# Altium PCB mppt.PcbDoc (part 4 of 6)
Units mm, origin at the board's own origin, x right, y up, seen from the top; angles counter-clockwise.
Board outline 161 x 166 mm, 6 copper layers (Top Layer, Layer 1, Layer 2, Layer 3, Layer 4, Bottom Layer), stack 0.815 mm thick; 460 components, 230 nets, 1421 pads, 2551 vias.
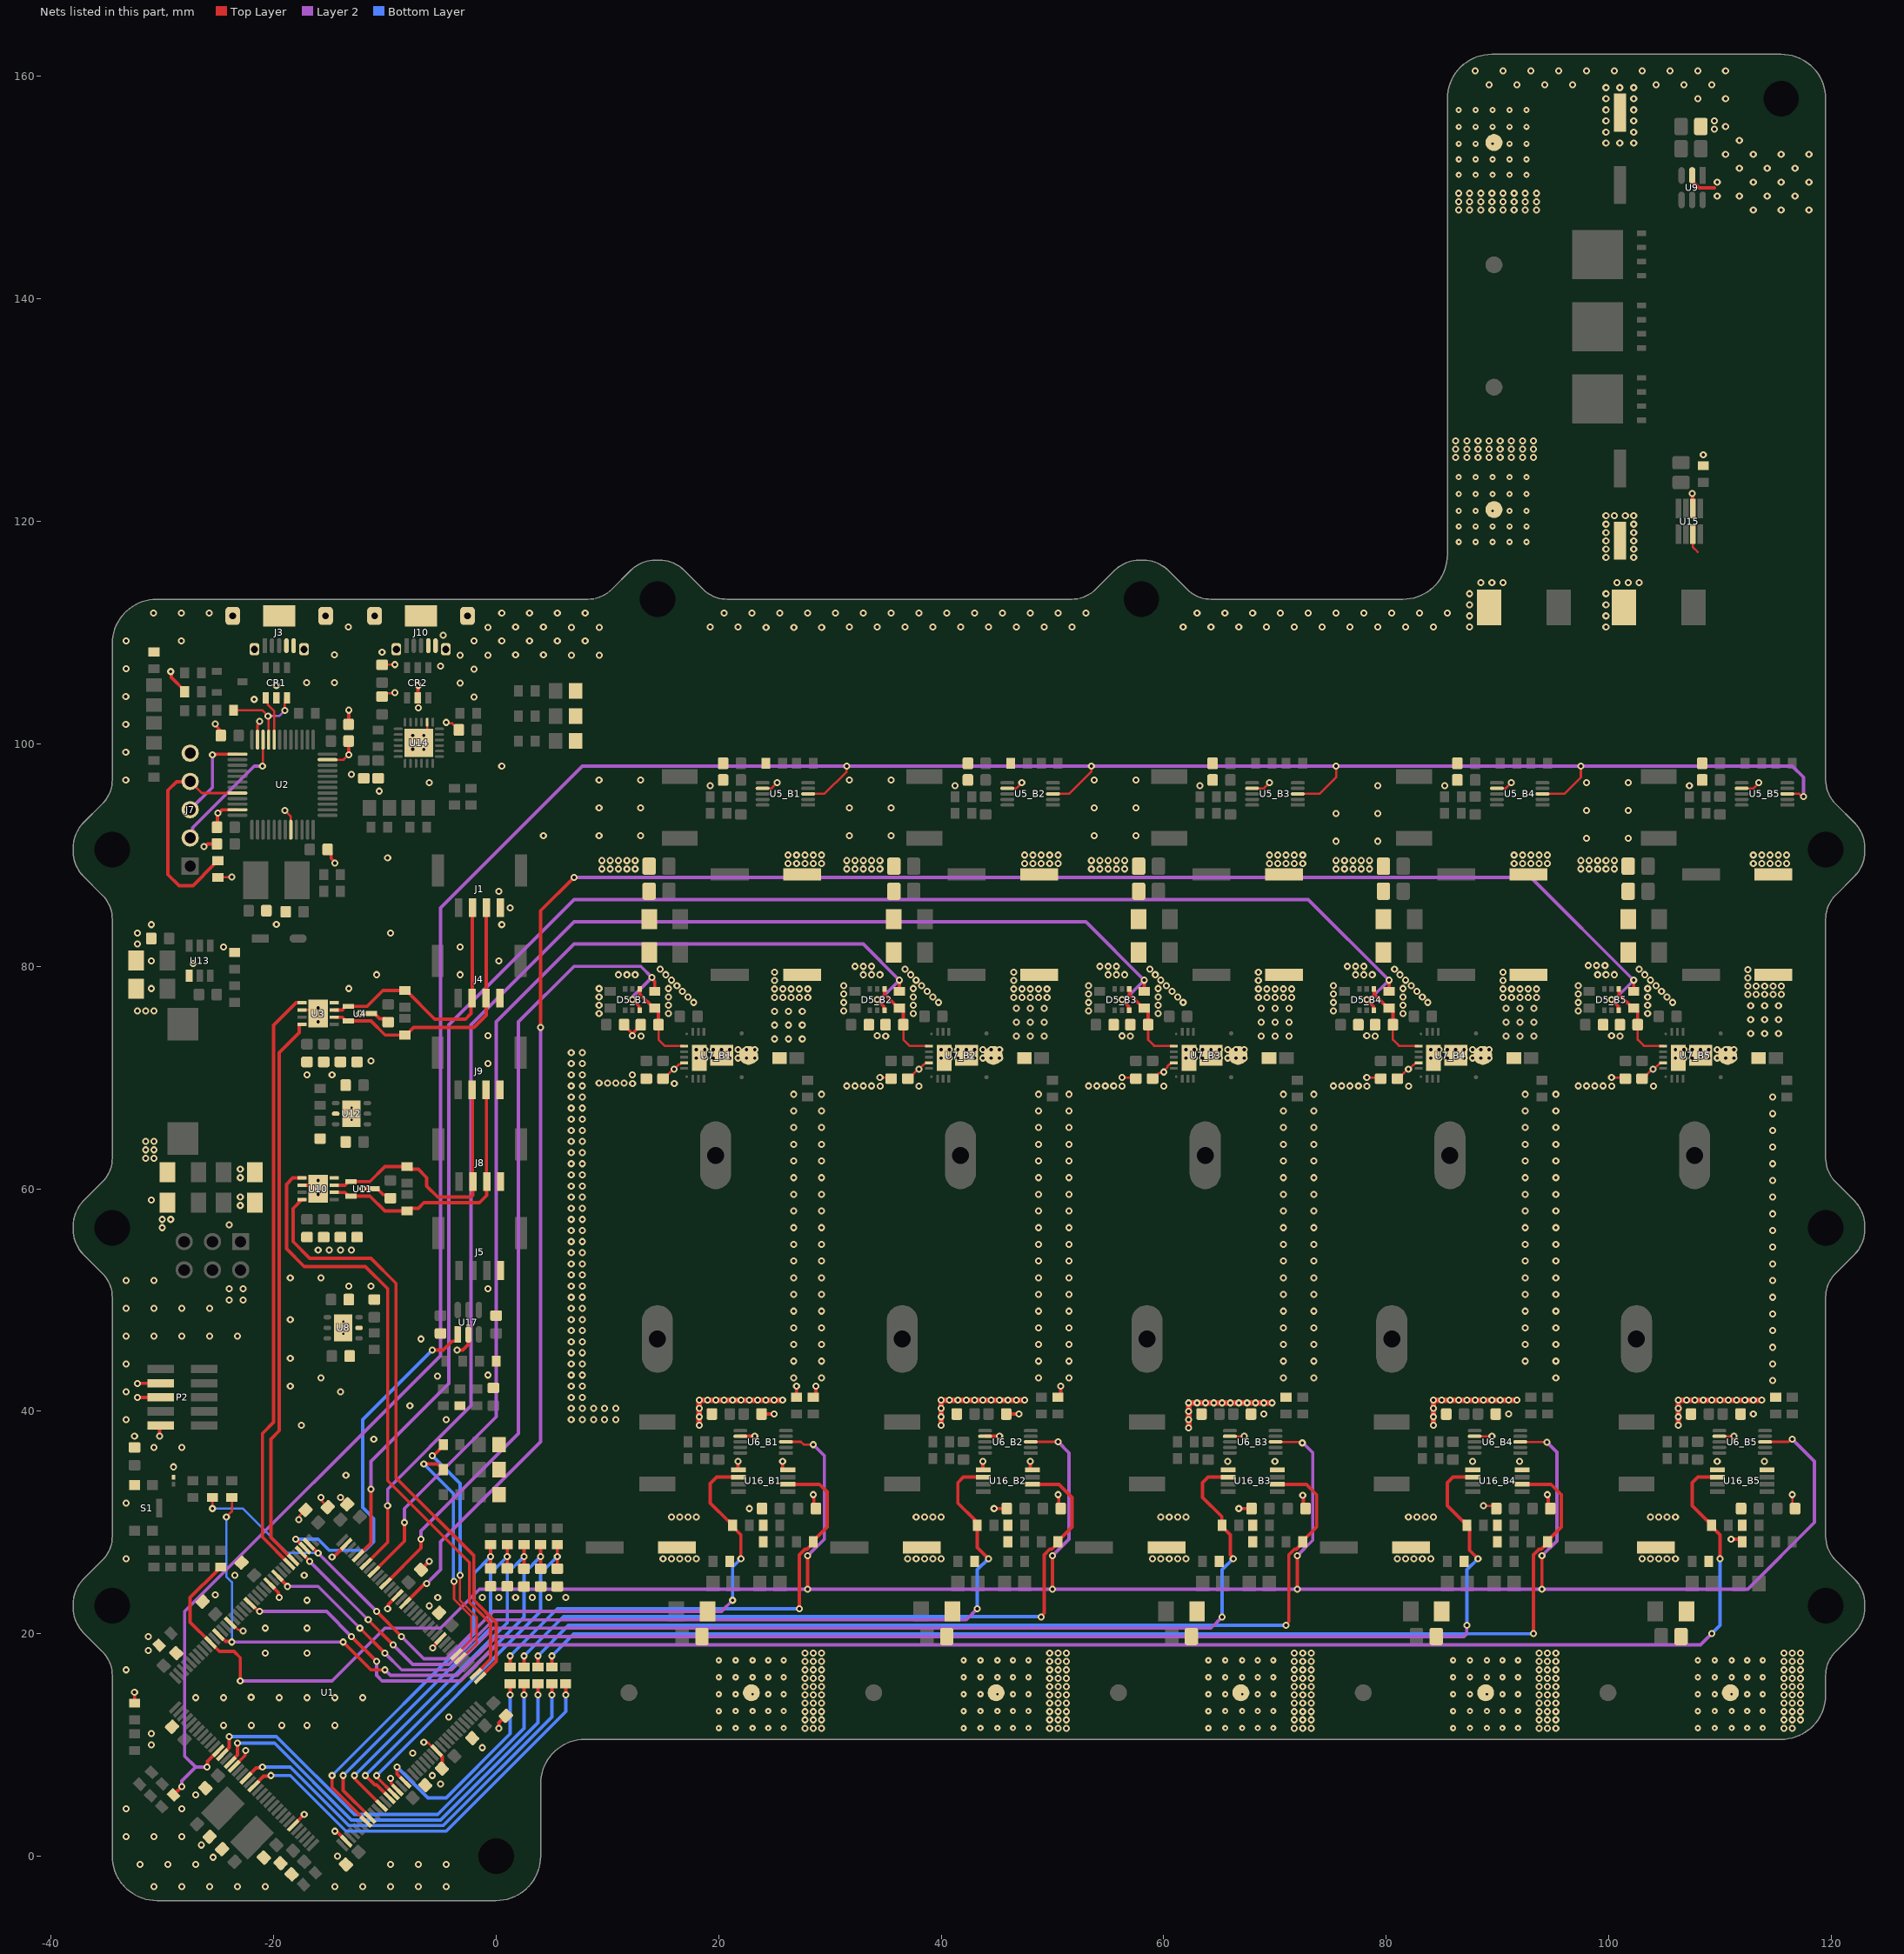
[diagram p7: the nets of this part, all layers, seen from the top]

## Via types
v1: diameter 0.635, hole 0.305, Top Layer to Bottom Layer, tented both sides, 2197 vias
v2: diameter 0.559, hole 0.203, Top Layer to Bottom Layer, tented both sides, 350 vias
v3: diameter 0.5, hole 0.2, Top Layer to Bottom Layer, 4 vias

## Nets (pads, with @x,y where several pads share a name; then routed paths per layer and width w, separated by ;. In a path a pad name is that pad's centre, name@x,y a point inside that pad or via, vN(x,y) a via of type N, cw(c..) or ccw(c..) an arc to the next point about the centre after c; other vN are vias at no path point) (continued)
ACTIVE: R75.1 U1.78 | length 22.1
  Top Layer w0.203: U1.78@-3.25,17.75 -3.153,17.75 -1.75,19.153 -1.75,21.5 -3.243,22.993 -3.243,25.243 v1(-3.25,25.25)
  Top Layer w0.3: v1(-5.75,36) -5.686,36.064 -5.586,36.064 -4.75,36.9 R75.1@-4.75,37
  Bottom Layer w0.3: v1(-5.75,36) -3.25,33.5 v1(-3.25,25.25)
ADC_I_IND_1: R10.2 U1.53 | length 19.9
  Top Layer w0.3: v1(-8.9,8.023) -8.9,7.39 U1.53@-8.167,6.657 ; v1(1.25,14.5) R10.2@1.25,15.5
  Bottom Layer w0.3: v1(-8.9,8.023) -6.127,5.25 -4.5,5.25 1.25,11 v1(1.25,14.5)
ADC_I_IND_2: R17.2 U1.13 | length 38.5
  Top Layer w0.3: U1.13@-24.608,9.132 -24.608,9.171 -24,9.778 v1(-24,10.75) ; v1(2.5,14.5) R17.2@2.5,15.5
  Bottom Layer w0.3: v1(-24,10.75) -19.75,10.75 -12.75,3.75 -5.25,3.75 2.5,11.5 v1(2.5,14.5)
ADC_I_IND_3: R18.2 U1.15 | length 39
  Top Layer w0.3: U1.15@-23.9,8.424 -23.9,8.464 -23.25,9.114 v1(-23.25,10.155) ; v1(3.75,14.5) R18.2@3.75,15.5
  Bottom Layer w0.3: v1(-23.25,10.155) -19.905,10.155 -13,3.25 -5,3.25 3.75,12 v1(3.75,14.5)
ADC_I_IND_4: R19.2 U1.19 | length 37.1
  Top Layer w0.3: U1.19@-22.486,7.01 -22.486,7.012 -21.562,7.936 -21.064,7.936 v1(-21,8) ; v1(5,14.5) R19.2@5,15.5
  Bottom Layer w0.3: v1(-21,8) -18.5,8 -13.25,2.75 -4.75,2.75 5,12.5 v1(5,14.5)
ADC_I_IND_5: R20.2 U1.21 | length 37.4
  Top Layer w0.3: U1.21@-21.779,6.303 -20.896,7.186 -20.314,7.186 v1(-20.25,7.25) ; v1(6.25,14.5) R20.2@6.25,15.5
  Bottom Layer w0.3: v1(-20.25,7.25) -18.5,7.25 -13.5,2.25 -4.5,2.25 6.25,13 v1(6.25,14.5)
ADC_NTC_1: C76.2 R21.2 U1.50 | length 30.8
  Top Layer w0.3: v1(-10.75,7.25) -10.686,7.186 -10.686,7.054 U1.50@-9.228,5.596 ; C76.2@5.5,25.85 v1(5.5,26.925) R21.2@5.5,28
  Bottom Layer w0.3: v1(-10.75,7.25) 4,22 4,25.425 v1(5.5,26.925)
ADC_NTC_2: C89.2 R22.2 U1.49 | length 31.3
  Top Layer w0.3: v1(-11.75,7.25) -10.899,6.399 -10.738,6.399 U1.49@-9.582,5.242 ; C89.2@4,25.85 v1(4,26.925) R22.2@4,28
  Bottom Layer w0.3: v1(-11.75,7.25) 2.5,21.5 2.5,25.425 v1(4,26.925)
ADC_NTC_3: C90.2 R23.2 U1.47 | length 31.9
  Top Layer w0.3: v1(-12.75,7.25) -12.686,7.186 -12.686,6.933 U1.47@-10.289,4.535 ; C90.2@2.5,25.85 v1(2.5,26.925) R23.2@2.5,28
  Bottom Layer w0.3: v1(-12.75,7.25) 1,21 1,25.425 v1(2.5,26.925)
ADC_NTC_4: C91.2 R24.2 U1.44 | length 32.7
  Top Layer w0.3: v1(-13.75,7.25) -13.75,5.915 -11.349,3.514 U1.44@-11.349,3.475 ; C91.2@1,25.863 v1(1,26.931) R24.2@1,28
  Bottom Layer w0.3: v1(-13.75,7.25) -0.5,20.5 -0.5,25.431 v1(1,26.931)
ADC_NTC_5: C92.2 R25.2 U1.43 | length 33.1
  Top Layer w0.3: v1(-14.75,7.25) -14.75,6.168 U1.43@-11.703,3.121 ; C92.2@-0.5,25.863 v1(-0.5,26.931) R25.2@-0.5,28
  Bottom Layer w0.3: v1(-14.75,7.25) -2,20 -2,25.431 v1(-0.5,26.931)
ALERT1: R48.1 U1.135 U6_B1.3 U6_B2.3 U6_B3.3 U6_B4.3 U6_B5.3 | length 238.8
  Top Layer w0.203: U6_B1.3@26.051,37.25 27.383,37.25 27.633,37 v1(28.5,37) ; U6_B2.3@48.051,37.25 v1(50.5,37.25) ; U6_B3.3@70.051,37.25 70.072,37.229 72.384,37.229 v1(72.46,37.153) ; U6_B4.3@92.051,37.25 92.072,37.229 94.424,37.229 v1(94.452,37.202) ; U6_B5.3@114.051,37.25 116.165,37.25 116.415,37.5 v1(116.5,37.5)
  Top Layer w0.3: R48.1@-24.75,26 -24.85,26 -25.1,25.75 -25.1,25.65 -27.5,23.25 -27.5,21.04 U1.135@-25.668,19.208 -24.874,18.414 -23.573,18.414 -23,17.841 v1(-23,15.75) ; v1(28,24) v1(28,27) ; v1(50,24) v1(50,27) ; v1(72,24) v1(72,27) ; v1(94,24) v1(94,27)
  Layer 2 w0.3: v1(-23,15.75) -14.75,15.75 -10,20.5 -5,20.5 -1.5,24 v1(28,24) v1(50,24) v1(72,24) v1(94,24) 112.5,24 118.5,30 118.5,35.5 v1(116.5,37.5) ; v1(28,27) 29.5,28.5 29.5,36 v1(28.5,37) ; v1(50,27) 51.5,28.5 51.5,36.25 v1(50.5,37.25) ; v1(72,27) 73.403,28.403 73.403,36.278 72.528,37.153 v1(72.46,37.153) ; v1(94,27) 95.345,28.345 95.345,36.309 v1(94.452,37.202)
ALERT2: R96.1 U1.12 U5_B1.3 U5_B2.3 U5_B3.3 U5_B4.3 U5_B5.3 | length 244.6
  Top Layer w0.203: U5_B1.3@28.051,95.5 29.5,95.5 31.5,97.5 v1(31.5,98) ; U5_B2.3@50.051,95.5 51.5,95.5 53.5,97.5 v1(53.5,98) ; U5_B3.3@72.051,95.5 74,95.5 75.5,97 v1(75.5,98) ; U5_B4.3@94.051,95.5 96,95.5 97.5,97 v1(97.5,98) ; U5_B5.3@116.051,95.5 117.133,95.5 117.383,95.25 v1(117.5,95.25)
  Top Layer w0.3: R96.1@-29,5.5 v1(-28.25,6.25) ; v1(-26,8) -25.936,8.064 -25.936,8.51 U1.12@-24.961,9.485
  Layer 2 w0.3: v1(-28.25,6.25) -28.25,6.75 -27,8 ; v1(-26,8) -27,8 ; v1(117.5,95.25) 117.5,97 116.5,98 v1(97.5,98) v1(75.5,98) v1(53.5,98) v1(31.5,98) 7.75,98 -5,85.25 -5,45 -28,22 -28,9 -27,8
B0: J7.4 R37.1 U2.44 | length 20.5
  Top Layer w0.203: J7.4@-27.5,96.62 -26.455,95.575 U2.44@-23.25,95.575
  Top Layer w0.3: J7.4@-27.5,96.62 -27.521,96.599 -28.725,96.599 -29.5,95.824 -29.5,88.25 -28.5,87.25 -27.25,87.25 -25.35,89.15 -25.35,89.25 -25.1,89.5 R37.1@-25,89.5
CAN1_H: J1.2 J4.2 R2.2 U3.7 U4.1 | length 23.9
  Top Layer w0.3: U3.7@-14.552,76.075 -13.825,76.075 -13.649,76.251 -13.649,76.321 -13.571,76.4 -11.6,76.4 -10.175,77.825 R2.2@-8.198,77.825 -8.098,77.825 -5.523,75.25 -2.75,75.25 -2.25,75.75 -2.25,77.05 J4.2@-2.15,77.15 -2.137,77.163 -2.137,85.261 J1.2@-2.125,85.273
CAN1_L: J1.3 J4.3 R3.1 U3.6 U4.2 | length 24.8
  Top Layer w0.3: U3.6@-14.552,75.425 -13.825,75.425 -13.649,75.249 -13.649,75.179 -13.571,75.1 -11.253,75.1 -9.978,73.825 R3.1@-8.198,73.825 -8.098,73.825 -7.423,74.5 -2,74.5 -0.9,75.6 J4.3@-0.9,77.15 -0.888,77.163 -0.888,85.261 J1.3@-0.875,85.273
CAN2_H: J8.2 J9.2 R50.2 U10.7 U11.1 | length 24.1
  Top Layer w0.3: U10.7@-14.302,60.325 -13.575,60.325 -13.399,60.501 -13.399,60.571 -13.321,60.65 U11.1@-13.041,60.65 -11.35,60.65 -10,62 R50.2@-8,62 -7.75,61.75 -7,61.75 -6.25,61 -6.25,60.25 -5.25,59.25 -2.276,59.25 -2.1,59.426 J8.2@-2.1,60.65 -2.125,60.675 -2.125,68.875 J9.2@-2.15,68.9
CAN2_L: J8.3 J9.3 R51.1 U10.6 U11.2 | length 24.3
  Top Layer w0.3: U10.6@-14.302,59.675 -13.575,59.675 -13.399,59.499 -13.399,59.429 -13.321,59.35 U11.2@-13.041,59.35 -11.35,59.35 -10,58 R51.1@-8,58 -7.75,58.25 -7,58.25 -6.5,58.75 -1.5,58.75 -0.85,59.4 J8.3@-0.85,60.65 -0.875,60.675 -0.875,68.875 J9.3@-0.9,68.9
CLK: J7.3 U2.37 | length 8
  Top Layer w0.3: v1(-25.5,99) -25.409,99 -25.334,99.075 U2.37@-23.25,99.075
  Layer 2 w0.3: J7.3@-27.5,94.08 -25.5,96.08 v1(-25.5,99)
D_N: CR1.1 U2.32 | length 4.1
  Top Layer w0.203: CR1.1@-20.7,104.135 -20.522,103.957 -20.522,103.522 -19.95,102.95 U2.32@-19.95,100.375
D_P: CR1.3 R42.1 U2.33 | length 8.5
  Top Layer w0.203: R42.1@-23.6,103.025 -21.025,103.025 v1(-20.5,102.5) -20.469,102.469 -20.469,100.394 U2.33@-20.45,100.375 ; v1(-19,103) -19,103.622 -18.978,103.645 -18.978,104.022 CR1.3@-18.75,104.25
  Layer 2 w0.203: v1(-20.5,102.5) -19.5,102.5 v1(-19,103)
DIO: J7.2 U2.34 | length 12
  Top Layer w0.203: v1(-21,98) -20.969,98.031 -20.969,100.356 U2.34@-20.95,100.375
  Layer 2 w0.3: J7.2@-27.5,91.54 -27.289,91.751 -27.289,92.461 -21.75,98 v1(-21,98)
  Bottom Layer w0.3: J7.2@-27.5,91.54 J7.2@-27.48,91.54 ; v1@-21.02,98 v1(-21,98)
EEV1: U1.111 U17.1 | length 32.2
  Top Layer w0.3: v1(-18,28.5) -17.995,28.5 -17.25,27.755 U1.111@-17.25,27.75 ; v1(-5.75,45.5) -4.75,45.5 -3.953,46.297 -3.585,46.297 -3.45,46.432 U17.1@-3.45,46.9
  Bottom Layer w0.3: v1(-18,28.5) -16,28.5 -15,27.5 -11.75,27.5 -11,28.25 -11,30.338 -12,31.338 -12,39.25 v1(-5.75,45.5)
ERR: R76.2 U1.79 | length 21.3
  Top Layer w0.203: v1(-3.789,24.711) -3.782,24.704 -3.782,23.1 -2.25,21.569 -2.25,19.468 U1.79@-3.468,18.25
  Top Layer w0.3: v1(-6.5,35.25) -5.25,35.25 -5.1,35.1 -5,35.1 -4.75,34.85 R76.2@-4.75,34.75
  Bottom Layer w0.3: v1(-6.5,35.25) -3.845,32.594 -3.845,24.767 v1(-3.789,24.711)
FDCAN1_RX: U1.114 U3.4 | length 50.3
  Top Layer w0.3: U1.114@-18.244,26.632 -20.25,28.639 -20.25,37.5 -19.5,38.25 -19.5,72.25 -17.704,74.046 -17.704,74.773 -17.702,74.775 U3.4@-17.448,74.775
FDCAN1_TX: U1.115 U3.1 | length 53.2
  Top Layer w0.3: U1.115@-18.597,26.279 -21,28.682 -21,38 -20,39 -20,74.71 -17.988,76.723 -17.45,76.723 U3.1@-17.448,76.725
FDCAN2_RX: U1.73 U10.4 | length 55
  Top Layer w0.3: U10.4@-17.198,59.025 -17.452,59.025 -18.25,58.227 -18.25,55.25 -16.75,53.75 -11.25,53.75 -9,51.5 -9,34 -2,27 -2,23 0,21 0,17.515 -1.45,16.065 U1.73@-1.45,16.026
FDCAN2_TX: U1.74 U10.1 | length 57.3
  Top Layer w0.3: U10.1@-17.198,60.975 U10.1@-17.448,60.975 -18.275,60.975 -18.845,60.405 -18.845,54.595 -17.25,53 -11.75,53 -9.75,51 -9.75,33.75 -2.402,26.402 -2.402,22.834 -0.5,20.932 -0.5,17.722 -1.803,16.419 U1.74@-1.803,16.379
FLT_1: R14.1 R16_B1.1 U1.110 U16_B1.6 | length 71.5
  Top Layer w0.203: v1(-25.5,31.25) R14.1@-25.5,32.25
  Top Layer w0.3: U1.110@-16.829,28.047 -16.813,28.047 -16.016,27.25 v1(-16,27.25) ; v1(-10.75,22) v1(-8.5,19.75) ; U16_B1.6@21.784,34.075 19.825,34.075 19.25,33.5 19.25,31.75 20.9,30.1 21,30.1 21.25,29.85 21.25,29.65 22,28.9 v1(22,26.75)
  Layer 2 w0.3: v1(-16,27.25) v1(-10.75,22) ; v1(-8.5,19.75) -6.5,17.75 -4.5,17.75 -0.25,22 20.25,22 v1(21.25,23)
  Bottom Layer w0.203: v1(-25.5,31.25) -22.75,31.25 -18.75,27.25 v1(-16,27.25)
  Bottom Layer w0.3: v1(21.25,23) 21.25,26 v1(22,26.75)
FLT_2: R16_B2.1 U1.112 U16_B2.6 | length 82.4
  Top Layer w0.3: U1.112@-17.536,27.34 -17.536,27.313 -16.75,26.527 v1(-16.75,26.5) ; v1(-11.5,21.25) v1(-9.25,19) ; U16_B2.6@43.784,34.075 42.001,34.075 41.5,33.574 41.5,31.75 43,30.25 43,30 R16_B2.1@43.25,29.75 43.25,27.75 v1(44.25,26.75)
  Layer 2 w0.3: v1(-16.75,26.5) v1(-11.5,21.25) ; v1(-9.25,19) -7.5,17.25 -4.25,17.25 -0.25,21.25 42.25,21.25 v1(43.25,22.25)
  Bottom Layer w0.3: v1(43.25,22.25) 43.25,25.75 v1(44.25,26.75)
FLT_3: R16_B3.1 U1.118 U16_B3.6 | length 106.5
  Top Layer w0.3: U1.118@-19.658,25.218 -19.658,25.188 -18.75,24.28 v1(-18.75,24.25) ; v1(-12.25,20.5) v1(-10,18.25) ; U16_B3.6@65.784,34.075 64.001,34.075 63.5,33.574 63.5,32.25 65.226,30.524 65.226,29.774 R16_B3.1@65.25,29.75 65.25,29.65 66,28.9 66,27.091 66.25,26.841 v1(66.25,26.75)
  Layer 2 w0.3: v1(-18.75,24.25) -16,24.25 v1(-12.25,20.5) ; v1(-10,18.25) -8.5,16.75 -4,16.75 -0.25,20.5 64.25,20.5 v1(65.25,21.5)
  Bottom Layer w0.3: v1(65.25,21.5) 65.25,25.75 v1(66.25,26.75)
FLT_4: R15.1 R16_B4.1 U1.133 U16_B4.6 | length 146.4
  Top Layer w0.203: v1(-24.25,30.5) -23.75,31 R15.1@-23.75,32.25
  Top Layer w0.3: U1.133@-24.961,19.915 -24.922,19.915 -24.321,19.314 -23.814,19.314 v1(-23.75,19.25) ; v1(-13.75,19.25) -11.25,16.75 v1(-10,16.75) ; U16_B4.6@87.784,34.075 86.001,34.075 85.5,33.574 85.5,31.5 86.9,30.1 87,30.1 87.25,29.85 R16_B4.1@87.25,29.75 87.5,29.5 87.5,27.5 v1(88.25,26.75)
  Layer 2 w0.3: v1(-23.75,19.25) v1(-13.75,19.25) ; v1(-10,16.75) -9.5,16.25 -3.5,16.25 0,19.75 87,19.75 87.233,19.983 87.233,20.733 v1(87.25,20.75)
  Bottom Layer w0.203: v1(-24.25,30.5) -24.25,25.125 -23.75,24.625 v1(-23.75,19.25)
  Bottom Layer w0.3: v1(87.25,20.75) 87.25,25.75 v1(88.25,26.75)
FLT_5: R16_B5.1 U1.125 U16_B5.6 | length 154.2
  Top Layer w0.3: U1.125@-22.133,22.743 -22.093,22.743 -21.414,22.064 -21.314,22.064 v1(-21.25,22) ; v1(-13,19.75) v1(-10.75,17.5) ; U16_B5.6@109.784,34.075 108.001,34.075 107.5,33.574 107.5,31.5 108.9,30.1 109,30.1 109.25,29.85 109.25,29.65 110,28.9 v1(110,26.75)
  Layer 2 w0.3: v1(-21.25,22) -15.25,22 v1(-13,19.75) ; v1(-10.75,17.5) -10.75,16.25 -10.25,15.75 -3.25,15.75 0,19 108,19 ; 108.001,18.999 108.249,18.999 v1(109.25,20)
  Bottom Layer w0.3: v1(109.25,20) 110,20.75 v1(110,26.75)
GND: C1.2 C2.2 C3.1 C4.1 C5.1 C6.1 C7.1 C8.1 C9.1 C10.1 C11.1 C12.1 C13.1 C14.1 C15.1 C16.1 C17.1 C18.1 C19.1 C20.1 C21.1 C22.1 C23_B1.1 C23_B2.1 C23_B3.1 C23_B4.1 C23_B5.1 C24_B1.1 C24_B2.1 C24_B3.1 C24_B4.1 C24_B5.1 C25_B1.1 C25_B2.1 C25_B3.1 C25_B4.1 C25_B5.1 C27_B1.1 C27_B2.1 C27_B3.1 C27_B4.1 C27_B5.1 C28_B1.1 C28_B2.1 C28_B3.1 C28_B4.1 C28_B5.1 C29_B1.2 C29_B2.2 C29_B3.2 C29_B4.2 C29_B5.2 C30_B1.2 C30_B2.2 C30_B3.2 C30_B4.2 C30_B5.2 C31_B1.1 C31_B2.1 C31_B3.1 C31_B4.1 C31_B5.1 C32_B1.1 C32_B2.1 C32_B3.1 C32_B4.1 C32_B5.1 C33_B1.1 C33_B2.1 C33_B3.1 C33_B4.1 C33_B5.1 C34_B1.1 C34_B2.1 C34_B3.1 C34_B4.1 C34_B5.1 C35_B1.1 C35_B2.1 C35_B3.1 C35_B4.1 C35_B5.1 C36_B1.2 C36_B2.2 C36_B3.2 C36_B4.2 C36_B5.2 C37_B1.1 C37_B2.1 C37_B3.1 C37_B4.1 C37_B5.1 C38.1 C39.1 C40.2 C41.1 C42.1 C43.1 C44.1 C45.1 C46.1 C47.1 C48.1 C49.1 C50_B1.1 C50_B2.1 C50_B3.1 C50_B4.1 C50_B5.1 C51_B1.1 C51_B2.1 C51_B3.1 C51_B4.1 C51_B5.1 C52_B1.1 C52_B2.1 C52_B3.1 C52_B4.1 C52_B5.1 C53.1 C54.1 C55.1 C56.1 C57.1 C58.1 C59.1 C60.1 C61.1 C64.1 C65.1 C67.1 C69.2 C70.2 C71.2 C72.2 C73.2 C74.2 C75.2 C76.1 C77.1 C78.1 C79.1 C80.1 C81.1 C82.1 C83.1 C84.1 C87_B1.1 C87_B2.1 C87_B3.1 C87_B4.1 C87_B5.1 C88_B1.1 C88_B2.1 C88_B3.1 C88_B4.1 C88_B5.1 C89.1 C90.1 C91.1 C92.1 C93.1 C94.1 CR1.2 CR2.2 D8.2 D9.K D10.K D11.K D12.K D13.K D14.K D15.2 D17.2 J1.4 J3.4 J3.5 J3.6 J3.7 J4.4 J5.4 J7.5 J8.4 J9.4 J10.4 J10.5 J10.6 J10.7 P2.3 P2.5 P2.9 R12_B1.1 R12_B3.1 R12_B5.1 R13_B1.2 R13_B2.2 R30.1 R34_B1.1 R34_B2.1 R34_B3.1 R34_B4.1 R34_B5.1 R37.2 R41.2 R44.2 R46_B1.2 R46_B2.2 R46_B3.2 R46_B4.2 R46_B5.2 R65.2 R67.2 R71.1 R84_B1.1 R84_B2.1 R84_B3.1 R84_B4.1 R84_B5.1 R85_B1.1 R85_B2.1 R85_B3.1 R85_B4.1 R85_B5.1 R86_B1.1 R86_B2.1 R93.1 R94.1 S1.2 SP2_B1.SP SP2_B2.SP SP2_B3.SP SP2_B4.SP SP2_B5.SP SP4.SP SP6.SP U1.16 U1.31 U1.38 U1.51 U1.61 U1.83 U1.94 U1.107 U1.120 U1.130 U2.8 U2.23 U2.35 U2.47 U3.2 U3.8 U3.9 U4.3 U5_B1.7 U5_B2.7 U5_B3.7 U5_B4.7 U5_B5.7 U6_B1.7 U6_B2.7 U6_B3.7 U6_B4.7 U6_B5.7 U7_B1.6 U7_B1.15 U7_B1.17 U7_B1.18 U7_B2.6 U7_B2.15 U7_B2.17 U7_B2.18 U7_B3.6 U7_B3.15 U7_B3.17 U7_B3.18 U7_B4.6 U7_B4.15 U7_B4.17 U7_B4.18 U7_B5.6 U7_B5.15 U7_B5.17 U7_B5.18 U8.2 U8.7 U9.2 U10.2 U10.8 U10.9 U11.3 U12.2 U12.7 U13.4 U14.2 U14.25 U15.2 U15.7 U16_B1.4 U16_B1.5 U16_B2.4 U16_B2.5 U16_B3.4 U16_B3.5 U16_B4.4 U16_B4.5 U16_B5.4 U16_B5.5 U17.2 | length 177.2
  Top Layer w0.203: R37.2@-25,88 -24.975,88.025 v1(-23.75,88.025) ; U1.130@-24,21 -23.828,21 -23.16,20.333 -22.833,20.333 v1(-22.75,20.25) ; U2.35@-21.45,100.375 -21.45,101.708 -21.25,101.908 v1(-21.25,102.025) ; v1(-19,94.025) -18.45,93.475 U2.8@-18.45,92.275 ; v1(-17.75,30.25) -17.667,30.333 -17.667,30.595 C11.1@-17.131,31.131 ; U3.2@-17.448,76.075 -16.325,76.075 U3.9@-16,75.75 ; v1(-15.75,32.25) -15.667,32.167 -15.667,31.917 C13.1@-15.131,31.381 ; U2.23@-15.15,98.575 -13.7,98.575 v1(-13.25,99.025) ; v1(-14,32.25) C1.2@-13.381,31.631 ; v1(-12.25,75.75) U4.3@-11.209,75.75 ; C81.1@-10.25,104.25 -9.96,104.54 -9.16,104.54 v1(-9.1,104.6) ; C79.1@-10.25,107.1 -10.225,107.125 v1(-9.1,107.125) ; v1(-6.5,10.25) -6.417,10.167 -6.082,10.167 -5.399,9.485 U1.61@-5.339,9.485 ; v1(-6.5,100.75) -6.2,101.05 U14.2@-6.2,101.951 ; v1(-4.5,101.925) -4.417,101.842 -3.942,101.842 -3.749,101.649 -3.718,101.649 -3.35,101.281 C80.1@-3.35,101.25 ; C51_B1.1@13.4,70 C51_B1.1@13.5,69.9 ; C25_B1.1@15,69.9 15.074,69.9 15.924,70.75 v1(16,70.75) 16.44,71.19 16.54,71.19 16.675,71.325 U7_B1.15@16.9,71.325 ; U5_B1.7@23.949,96 24.75,96 v1(25.25,96.5) ; v1(34.5,70) 35.4,70 C51_B2.1@35.5,69.9 ; C25_B2.1@37,69.9 37.074,69.9 37.924,70.75 v1(38,70.75) 38.403,71.153 38.441,71.153 38.589,71.302 38.877,71.302 U7_B2.15@38.9,71.325 ; U5_B2.7@45.949,96 46.75,96 v1(47.25,96.5) ; v1(56.25,70) 57.4,70 C51_B3.1@57.5,69.9 ; C25_B3.1@59,69.9 59.074,69.9 59.592,70.417 59.917,70.417 v1(60,70.5) 60,70.617 60.347,70.964 60.347,71.034 60.471,71.158 60.508,71.158 60.675,71.325 U7_B3.15@60.9,71.325 ; U6_B3.7@65.949,37.75 v1(67.25,37.75) ; U5_B3.7@67.949,96 69,96 v1(69.5,96.5) ; v1(78.25,70) 79.4,70 C51_B4.1@79.5,69.9 ; C25_B4.1@81,69.9 81.074,69.9 81.924,70.75 v1(82,70.75) 82.063,70.75 82.466,71.153 82.503,71.153 82.675,71.325 U7_B4.15@82.9,71.325 ; U6_B4.7@87.949,37.75 v1(89.5,37.75) ; v1(88.75,31.5) 89.65,31.5 C87_B4.1@89.9,31.25 ; U5_B4.7@89.949,96 90.75,96 v1(91.25,96.5) ; v1(100.25,70) 101.4,70 C51_B5.1@101.5,69.9 ; C25_B5.1@103,69.9 103.074,69.9 103.924,70.75 v1(104,70.75) 104.063,70.75 104.466,71.153 104.503,71.153 104.675,71.325 U7_B5.15@104.9,71.325 ; U15.7@107.575,118.849 107.575,117.675 108,117.25 ; U6_B5.7@109.949,37.75 v1(111.25,37.75) ; U5_B5.7@111.949,96 113,96 v1(113.5,96.5) ; v1(116.5,32.5) 116.51,32.49 116.51,31.49 C88_B5.1@116.75,31.25
  Top Layer w0.3: R67.2@-32.5,13.75 v1(-32.5,14.75) ; v1(-32.25,41.25) P2.5@-30.15,41.25 ; v1(-32.25,42.5) -32.24,42.51 -30.16,42.51 P2.3@-30.15,42.52 ; v1(-30.25,37.75) -30.25,38.61 P2.9@-30.15,38.71 ; v1(-29.25,106.5) -29.186,106.436 -29.186,105.961 -28,104.775 R41.2@-28,104.675 ; v1(-26.25,90.775) -26.159,90.775 -25.934,91 C44.1@-25.1,91 ; v1(-25.25,101.775) -25.186,101.711 -25.186,101.613 -24.45,100.877 C41.1@-24.45,100.825 ; C43.1@-25.1,92.5 -25.05,92.55 -25.05,93.725 v1(-25,93.775) -24.909,93.775 -24.609,94.075 U2.47@-23.25,94.075 ; U1.16@-23.547,8.071 -22.564,9.054 -22.564,9.436 v1(-22.5,9.5) ; U1.120@-20.365,24.511 -19.564,23.71 -19.564,23.314 v1(-19.5,23.25) ; U1.31@-18.244,2.768 -18.238,2.768 -17.256,3.75 v1(-17.25,3.75) ; U10.2@-17.198,60.325 -16.075,60.325 U10.9@-15.75,60 ; C45.1@-15.15,90.5 -14.828,90.177 -14.828,89.693 -14.5,89.366 v1(-14.5,89.275) ; v1(-14.75,26.905) -14.686,26.97 -14.548,26.97 -13.517,28 U1.107@-13.5,28 ; v1(-14.5,2.25) -14.436,2.186 -14.303,2.186 U1.38@-13.471,1.353 ; C46.1@-13.263,100.25 -13.256,100.244 -13.256,99.031 v1(-13.25,99.025) ; C42.1@-13.263,101.75 -13.256,101.756 -13.256,103.019 v1(-13.25,103.025) ; v1(-12,60) U11.3@-10.959,60 -10.679,60 -10.152,59.473 -9.822,59.473 C54.1@-9.5,59.15 ; U4.3@-11.209,75.75 -10.929,75.75 -10.477,75.297 -10.02,75.297 C19.1@-9.698,74.975 ; v1(-9.75,22.25) -9.686,22.314 -9.686,22.639 U1.94@-8.874,23.45 ; v1(-9.5,7) -9.436,6.936 -9.436,6.55 -8.874,5.989 U1.51@-8.874,5.95 ; CR2.2@-7.05,104.135 -7.025,104.16 -7.025,105.225 v1(-7,105.25) ; C12.1@-6.75,25.75 v1(-6,26.5) ; v1(-5.711,18.711) -5.711,18.796 -4.985,19.522 U1.83@-4.985,19.561 ; U1.61@-5.339,9.485 -5.339,9.446 -4.839,8.946 -4.839,8.441 -5,8.28 C8.1@-5,7.75 ; v1(-3.5,45.5) -3,45.5 -2.504,45.996 -2.504,46.996 U17.2@-2.5,47 ; C2.2@-2.14,10.61 C2.2@-2.103,10.572 ; v1(0.25,11.5) 0.25,11.987 C10.1@0.881,12.619 ; C28_B1.1@11.5,74.75 11.5,74.698 12.186,74.012 12.186,73.814 v1(12.25,73.75) 12.314,73.814 12.314,74.012 13,74.698 C27_B1.1@13,74.75 ; v1(18.25,40.25) 18.314,40.186 v1@18.405,40.186 ; C23_B1.1@19.078,40.113 19.4,39.791 C23_B1.1@19.4,39.75 ; v1(21.75,35.5) 21.75,34.759 U16_B1.5@21.784,34.725 ; U6_B1.7@21.949,37.75 v1(23.25,37.75) ; C50_B1.1@23.85,39.75 v1(25,39.75) ; v1(25.75,35.5) 25.75,34.791 25.816,34.725 U16_B1.4@26.216,34.725 ; R12_B1.1@27,41.25 v1(27,42.25) ; v1(28.5,32.5) 28.564,32.436 28.564,31.436 C88_B1.1@28.75,31.25 ; R86_B1.1@28.5,41.25 28.75,41.5 v1(28.75,42.25) ; v1(40,40.25) 40.064,40.186 v1@40.155,40.186 ; v1(43.75,35.5) 43.75,34.759 U16_B2.5@43.784,34.725 ; U6_B2.7@43.949,37.75 v1(45.25,37.75) ; v1(44.75,31.25) C87_B2.1@45.9,31.25 ; C50_B2.1@45.85,39.75 v1(47,39.75) ; v1(48,35.5) 48,34.791 48.066,34.725 U16_B2.4@48.216,34.725 ; v1(50.5,32.5) 50.564,32.436 50.564,31.436 C88_B2.1@50.75,31.25 ; R86_B2.1@50.5,41.25 50.75,41.5 v1(50.75,42.25) ; v1(62.25,40) 62.314,39.936 v1@62.405,39.936 ; v1(66.75,31.25) C87_B3.1@67.9,31.25 ; v1(72.497,32.451) 72.562,32.387 72.562,31.438 C88_B3.1@72.75,31.25 ; v1(84.25,40.25) 84.314,40.186 v1@84.405,40.186 ; v1(94.5,32.5) 94.564,32.436 94.564,31.436 C88_B4.1@94.75,31.25 ; v1(106.25,40.25) 106.314,40.186 v1@106.405,40.186 ; v1(107.5,122.5) 107.538,122.462 107.538,121.188 U15.2@107.575,121.151 ; U9.2@107.5,151.1 107.5,150.633 108.133,150 109.5,150 ; v1(111,28.5) 111.75,28.5 R85_B5.1@112,28.25
  Top Layer w0.5: v1(18.25,38.75) v1(18.25,41) v1(19,41) v1(19.75,41) v1(20.5,41) v1(21.25,41) v1(22,41) v1(22.75,41) v1(23.5,41) v1(24.25,41) v1(25,41) v1(25.75,41) ; v1(40,38.75) v1(40,41) v1(40.75,41) v1(41.5,41) v1(42.25,41) v1(43,41) v1(43.75,41) v1(44.5,41) v1(45.25,41) v1(46,41) v1(46.75,41) v1(47.5,41) ; v1(62.25,38.5) v1(62.25,40.75) v1(63,40.75) v1(63.75,40.75) v1(64.5,40.75) v1(65.25,40.75) v1(66,40.75) v1(66.75,40.75) v1(67.5,40.75) v1(68.25,40.75) v1(69,40.75) v1(69.75,40.75) ; v1(84.25,38.75) v1(84.25,41) v1(85,41) v1(85.75,41) v1(86.5,41) v1(87.25,41) v1(88,41) v1(88.75,41) v1(89.5,41) v1(90.25,41) v1(91,41) v1(91.75,41) ; v1(106.25,38.75) v1(106.25,41) v1(107,41) v1(107.75,41) v1(108.5,41) v1(109.25,41) v1(110,41) v1(110.75,41) v1(111.5,41) v1(112.25,41) v1(113,41) v1(113.75,41)
  other v1: -30.75,-2.75 -28.25,-2.75 -25.75,-2.75 -23.25,-2.75 -20.75,-2.75 -14.5,-2.75 -12,-2.75 -9.5,-2.75 -7,-2.75 -4.5,-2.75 -32,-0.75 -29.5,-0.75 -27,-0.75 -9.5,-0.75 -7,-0.75 -4.5,-0.75 -25.432,-0.102 -14.25,0 -26.5,1 -33.25,1.75 -30.75,1.75 -28.25,1.75 -33.25,4.25 -28.25,4.25 -27,5.5 -5,6.5 -5.75,7.25 -7.5,9.25 -1.25,9.75 -31,10 -31,11.025 27.75,11.5 28.5,11.5 29.25,11.5 49.75,11.5 50.5,11.5 51.25,11.5 71.75,11.5 72.5,11.5 73.25,11.5 93.75,11.5 94.5,11.5 95.25,11.5 115.75,11.5 116.5,11.5 -24.5,11.75 -22,11.75 -19.25,11.75 -17,11.75 -14.5,11.75 27.75,12.25 28.5,12.25 29.25,12.25 49.75,12.25 50.5,12.25 51.25,12.25 71.75,12.25 72.5,12.25 73.25,12.25 93.75,12.25 94.5,12.25 95.25,12.25 115.75,12.25 116.5,12.25 117.25,12.25 -4.25,12.5 27.75,13 28.5,13 29.25,13 49.75,13 50.5,13 51.25,13 71.75,13 72.5,13 73.25,13 93.75,13 94.5,13 95.25,13 115.75,13 116.5,13 117.25,13 27.75,13.75 28.5,13.75 29.25,13.75 49.75,13.75 50.5,13.75 51.25,13.75 71.75,13.75 72.5,13.75 73.25,13.75 93.75,13.75 94.5,13.75 95.25,13.75 115.75,13.75 116.5,13.75 117.25,13.75 -27,14.25 -24.5,14.25 -19.5,14.25 -17,14.25 -14.5,14.25 -12,14.25 -22.022,14.284 27.75,14.5 28.5,14.5 29.25,14.5 49.75,14.5 50.5,14.5 51.25,14.5 71.75,14.5 72.5,14.5 73.25,14.5 93.75,14.5 94.5,14.5 95.25,14.5 115.75,14.5 116.5,14.5 117.25,14.5 27.75,15.25 28.5,15.25 29.25,15.25 49.75,15.25 50.5,15.25 51.25,15.25 71.75,15.25 72.5,15.25 73.25,15.25 93.75,15.25 94.5,15.25 95.25,15.25 115.75,15.25 116.5,15.25 117.25,15.25 27.75,16 28.5,16 29.25,16 49.75,16 50.5,16 51.25,16 71.75,16 72.5,16 73.25,16 93.75,16 94.5,16 95.25,16 115.75,16 116.5,16 117.25,16 -33.25,16.75 27.75,16.75 28.5,16.75 29.25,16.75 49.75,16.75 50.5,16.75 51.25,16.75 71.75,16.75 72.5,16.75 73.25,16.75 93.75,16.75 94.5,16.75 95.25,16.75 115.75,16.75 116.5,16.75 117.25,16.75 27.75,17.5 28.5,17.5 29.25,17.5 49.75,17.5 50.5,17.5 51.25,17.5 71.75,17.5 72.5,17.5 73.25,17.5 93.75,17.5 94.5,17.5 95.25,17.5 115.75,17.5 116.5,17.5 117.25,17.5 -20.75,18.25 -17,18.25 27.75,18.25 28.5,18.25 29.25,18.25 49.75,18.25 50.5,18.25 51.25,18.25 71.75,18.25 72.5,18.25 73.25,18.25 93.75,18.25 94.5,18.25 95.25,18.25 115.75,18.25 116.5,18.25 117.25,18.25 -31.25,18.5 -31.25,19.75 -20.75,20.5 -17,20.5 -6,22.5 -17,23 -5.25,23.25 -1.25,23.25 0.25,23.25 1.75,23.25 3.25,23.25 4.75,23.25 6.25,23.25 -25.25,23.5 -23.5,25.25 -17.25,25.25 -33.25,26.75 15,26.75 15.75,26.75 16.5,26.75 17.25,26.75 18,26.75 37,26.75 37.75,26.75 38.5,26.75 39.25,26.75 40,26.75 59,26.75 59.75,26.75 60.5,26.75 61.25,26.75 62,26.75 81,26.75 81.75,26.75 82.5,26.75 83.25,26.75 84,26.75 103,26.75 103.75,26.75 104.5,26.75 105.25,26.75 106,26.75 15.75,30.5 16.5,30.5 17.25,30.5 18,30.5 37.75,30.5 38.5,30.5 39.25,30.5 40,30.5 59.75,30.5 60.5,30.5 61.25,30.5 62,30.5 82,30.5 82.75,30.5 83.5,30.5 84.25,30.5 103.75,30.5 104.5,30.5 105.25,30.5 106,30.5 22.75,31.25 -33.25,31.75 -13.5,34.25 -29,35 65.75,35.5 70,35.5 87.75,35.5 92,35.5 109.75,35.5 114,35.5 -30.75,36.75 -28.25,36.75 -11,37.5 -32.5,37.75 -17.5,38.75 -33.25,39.25 -4.5,39.25 6.75,39.25 7.75,39.25 8.75,39.25 9.75,39.25 10.75,39.25 62.25,39.25 18.25,39.5 40,39.5 84.25,39.5 106.25,39.5 69,39.75 91,39.75 113,39.75 6.75,40.25 7.75,40.25 8.75,40.25 9.75,40.25 10.75,40.25 -7.75,40.5 6.75,41.25 7.75,41.25 -33.25,41.75 -14,41.75 -18.5,42.25 6.75,42.25 7.75,42.25 114.75,42.75 -15.75,43 26.75,43 29.25,43 48.75,43 51.5,43 70.75,43 73.5,43 95.25,43 -5.271,43.154 -0.75,43.25 6.75,43.25 7.75,43.25 -33.25,44.25 6.75,44.25 7.75,44.25 114.75,44.25 26.75,44.5 29.25,44.5 48.75,44.5 51.5,44.5 70.75,44.5 73.5,44.5 92.5,44.5 95.25,44.5 -18.5,44.75 6.75,45.25 7.75,45.25 114.75,45.75 26.75,46 29.25,46 48.75,46 51.5,46 70.75,46 73.5,46 92.5,46 95.25,46 6.75,46.25 7.75,46.25 -6.75,46.5 -33.25,46.75 -30.75,46.75 -28.25,46.75 -25.75,46.75 -23.25,46.75 6.75,47.25 7.75,47.25 114.75,47.25 26.75,47.5 29.25,47.5 48.75,47.5 51.5,47.5 70.75,47.5 73.5,47.5 92.5,47.5 95.25,47.5 -18.5,48.25 6.75,48.25 7.75,48.25 114.75,48.75 26.75,49 29.25,49 48.75,49 51.5,49 70.75,49 73.5,49 92.5,49 95.25,49 -33.25,49.25 -30.75,49.25 -28.25,49.25 -25.75,49.25 6.75,49.25 7.75,49.25 -24,50 -22.75,50 6.75,50.25 7.75,50.25 114.75,50.25 26.75,50.5 29.25,50.5 48.75,50.5 51.5,50.5 70.75,50.5 73.5,50.5 92.5,50.5 95.25,50.5 -24,51 -22.75,51 -0.75,51 -13.25,51.25 -11.25,51.25 6.75,51.25 7.75,51.25 -33.25,51.75 -30.75,51.75 114.75,51.75 -18.5,52 -15.75,52 26.75,52 29.25,52 48.75,52 51.5,52 70.75,52 73.5,52 92.5,52 95.25,52 6.75,52.25 7.75,52.25 6.75,53.25 7.75,53.25 114.75,53.25 26.75,53.5 29.25,53.5 48.75,53.5 51.5,53.5 70.75,53.5 73.5,53.5 92.5,53.5 95.25,53.5 6.75,54.25 7.75,54.25 -16,54.5 -15,54.5 -14,54.5 -13,54.5 114.75,54.75 26.75,55 29.25,55 48.75,55 51.5,55 70.75,55 73.5,55 92.5,55 95.25,55 6.75,55.25 7.75,55.25 6.75,56.25 7.75,56.25 114.75,56.25 -30,56.5 26.75,56.5 29.25,56.5 48.75,56.5 51.5,56.5 70.75,56.5 73.5,56.5 92.5,56.5 95.25,56.5 -24,56.75 -30,57.25 -29.25,57.25 6.75,57.25 7.75,57.25 114.75,57.75 26.75,58 29.25,58 48.75,58 51.5,58 70.75,58 73.5,58 92.5,58 95.25,58 6.75,58.25 7.75,58.25 -23,58.5 -31,59 -23,59.25 6.75,59.25 7.75,59.25 114.75,59.25 -16,59.5 26.75,59.5 29.25,59.5 48.75,59.5 51.5,59.5 70.75,59.5 73.5,59.5 92.5,59.5 95.25,59.5 6.75,60.25 7.75,60.25 -16,60.75 114.75,60.75 -23,61 26.75,61 29.25,61 48.75,61 51.5,61 70.75,61 73.5,61 92.5,61 95.25,61 6.75,61.25 7.75,61.25 -23,61.75 6.75,62.25 7.75,62.25 114.75,62.25 26.75,62.5 29.25,62.5 48.75,62.5 51.5,62.5 70.75,62.5 73.5,62.5 92.5,62.5 95.25,62.5 -31.5,62.75 -30.75,62.75 6.75,63.25 7.75,63.25 -31.5,63.5 -30.75,63.5 114.75,63.75 26.75,64 29.25,64 48.75,64 51.5,64 70.75,64 73.5,64 92.5,64 95.25,64 -31.5,64.25 -30.75,64.25 6.75,64.25 7.75,64.25 6.75,65.25 7.75,65.25 114.75,65.25 26.75,65.5 29.25,65.5 48.75,65.5 51.5,65.5 70.75,65.5 73.5,65.5 92.5,65.5 95.25,65.5 6.75,66.25 7.75,66.25 114.75,66.75 26.75,67 29.25,67 48.75,67 51.5,67 70.75,67 73.5,67 92.5,67 95.25,67 6.75,67.25 7.75,67.25 6.75,68.25 7.75,68.25 114.75,68.25 26.75,68.5 29.25,68.5 48.75,68.5 51.5,68.5 70.75,68.5 73.5,68.5 92.5,68.5 95.25,68.5 34.512,69.216 38.012,69.216 56.262,69.216 60.012,69.216 78.262,69.216 82.012,69.216 100.262,69.216 104.012,69.216 6.75,69.25 7.75,69.25 31.5,69.25 32.25,69.25 33,69.25 33.75,69.25 53.25,69.25 54,69.25 54.75,69.25 55.5,69.25 75.25,69.25 76,69.25 76.75,69.25 77.5,69.25 97.25,69.25 98,69.25 98.75,69.25 99.5,69.25 12.262,69.466 16.012,69.466 9.25,69.5 10,69.5 10.75,69.5 11.5,69.5 -17,70.25 -14.75,70.25 6.75,70.25 7.75,70.25 12.25,70.25 -0.75,71.25 6.75,71.25 7.75,71.25 -11.25,71.5 18,71.75 18.75,71.75 19.5,71.75 20.25,71.75 21,71.75 21.75,71.75 22.5,71.75 23.25,71.75 40,71.75 40.75,71.75 41.5,71.75 42.25,71.75 43,71.75 43.75,71.75 44.5,71.75 45.25,71.75 62,71.75 62.75,71.75 63.5,71.75 64.25,71.75 65,71.75 65.75,71.75 66.5,71.75 67.25,71.75 84,71.75 84.75,71.75 85.5,71.75 86.25,71.75 87,71.75 87.75,71.75 88.5,71.75 89.25,71.75 106,71.75 106.75,71.75 107.5,71.75 108.25,71.75 109,71.75 109.75,71.75 110.5,71.75 111.25,71.75 6.75,72.25 7.75,72.25 18,72.5 18.75,72.5 19.5,72.5 20.25,72.5 21,72.5 21.75,72.5 22.5,72.5 23.25,72.5 40,72.5 40.75,72.5 41.5,72.5 42.25,72.5 43,72.5 43.75,72.5 44.5,72.5 45.25,72.5 62,72.5 62.75,72.5 63.5,72.5 64.25,72.5 65,72.5 65.75,72.5 66.5,72.5 67.25,72.5 84,72.5 84.75,72.5 85.5,72.5 86.25,72.5 87,72.5 87.75,72.5 88.5,72.5 89.25,72.5 106,72.5 106.75,72.5 107.5,72.5 108.25,72.5 109,72.5 109.75,72.5 110.5,72.5 111.25,72.5 25.012,73.466 26.262,73.466 27.512,73.466 13.012,73.716 35.012,73.716 46.762,73.716 48.012,73.716 49.262,73.716 57.012,73.716 68.762,73.716 70.012,73.716 71.262,73.716 79.012,73.716 90.762,73.716 92.012,73.716 93.262,73.716 101.012,73.716 56.254,73.741 -0.75,73.75 34.25,73.75 78.25,73.75 100.25,73.75 112.762,73.966 114.012,73.966 115.262,73.966 25.012,74.716 26.262,74.716 27.512,74.716 46.762,74.966 48.012,74.966 49.262,74.966 68.762,74.966 70.012,74.966 71.262,74.966 90.762,74.966 92.012,74.966 93.262,74.966 -16,75 112.762,75.216 114.012,75.216 115.262,75.216 9.25,75.75 15.5,75.75 37.5,75.75 59.5,75.75 81.5,75.75 103.5,75.75 25.012,75.966 26.262,75.966 27.512,75.966 -32.25,76 -31.5,76 -30.75,76 31.25,76 53.25,76 75.25,76 97.25,76 46.762,76.216 48.012,76.216 49.262,76.216 68.762,76.216 70.012,76.216 71.262,76.216 90.762,76.216 92.012,76.216 93.262,76.216 -16,76.25 112.762,76.466 114.012,76.466 115.262,76.466 9.25,76.5 15.5,76.5 37.5,76.5 59.5,76.5 81.5,76.5 103.5,76.5 17.75,76.75 31.25,76.75 39.75,76.75 53.25,76.75 61.75,76.75 75.25,76.75 83.75,76.75 97.25,76.75 105.75,76.75 25.012,77.216 25.762,77.216 26.512,77.216 27.262,77.216 28.012,77.216 46.512,77.216 47.262,77.216 48.012,77.216 48.762,77.216 49.512,77.216 68.512,77.216 69.262,77.216 70.012,77.216 70.762,77.216 71.512,77.216 90.512,77.216 91.262,77.216 92.012,77.216 92.762,77.216 93.512,77.216 9.25,77.25 15.5,77.25 17.25,77.25 37.5,77.25 39.25,77.25 59.5,77.25 61.25,77.25 81.5,77.25 83.25,77.25 103.5,77.25 105.25,77.25 112.512,77.466 113.262,77.466 114.012,77.466 114.762,77.466 115.512,77.466 31.25,77.5 53.25,77.5 75.25,77.5 97.25,77.5 16.75,77.75 38.75,77.75 60.75,77.75 82.75,77.75 104.75,77.75 25.012,77.966 25.762,77.966 26.512,77.966 27.262,77.966 28.012,77.966 46.512,77.966 47.262,77.966 48.012,77.966 48.762,77.966 49.512,77.966 68.512,77.966 69.262,77.966 70.012,77.966 70.762,77.966 71.512,77.966 90.512,77.966 91.262,77.966 92.012,77.966 92.762,77.966 93.512,77.966 -31,78 -13.25,78 9.25,78 15.5,78 37.5,78 59.5,78 81.5,78 103.5,78 112.512,78.216 113.262,78.216 114.012,78.216 114.762,78.216 115.512,78.216 16.25,78.25 31.25,78.25 38.25,78.25 53.25,78.25 60.25,78.25 75.25,78.25 82.25,78.25 97.25,78.25 104.25,78.25 25.012,78.716 46.512,78.716 68.512,78.716 90.512,78.716 15.75,78.75 37.75,78.75 59.75,78.75 81.75,78.75 103.75,78.75 112.512,78.966 -10.75,79.25 -3.25,79.25 11,79.25 11.75,79.25 12.5,79.25 15.25,79.25 33,79.25 33.75,79.25 34.5,79.25 37.25,79.25 55,79.25 55.75,79.25 56.5,79.25 59.25,79.25 77.25,79.25 78,79.25 78.75,79.25 81.25,79.25 99,79.25 99.75,79.25 100.5,79.25 103.25,79.25 25.012,79.466 46.512,79.466 68.512,79.466 90.512,79.466 112.512,79.716 14.75,79.75 36.75,79.75 58.75,79.75 80.75,79.75 102.75,79.75 32.25,80 33,80 33.75,80 54.25,80 55,80 55.75,80 76.5,80 77.25,80 78,80 98.168,80.076 98.918,80.076 99.668,80.076 -27.25,80.25 -31,80.5 0.25,80.5 -24.5,81.75 -3.25,81.75 -32.25,82 -32.25,83 -9.5,83 -31,83.75 0.5,83.75 -19.75,83.775 1.25,85.25 0.25,86.75 9.5,88.75 10.25,88.75 11,88.75 11.75,88.75 12.5,88.75 31.5,88.75 32.25,88.75 33,88.75 33.75,88.75 34.5,88.75 53.5,88.75 54.25,88.75 55,88.75 55.75,88.75 56.5,88.75 75.5,88.75 76.25,88.75 77,88.75 77.75,88.75 78.5,88.75 97.5,88.75 98.25,88.75 99,88.75 99.75,88.75 100.5,88.75 26.25,89.25 27,89.25 27.75,89.25 28.5,89.25 29.25,89.25 47.5,89.25 48.25,89.25 49,89.25 49.75,89.25 50.5,89.25 69.5,89.25 70.25,89.25 71,89.25 71.75,89.25 72.5,89.25 91.5,89.25 92.25,89.25 93,89.25 93.75,89.25 94.5,89.25 113,89.25 113.75,89.25 114.5,89.25 115.25,89.25 116,89.25 9.5,89.5 10.25,89.5 11,89.5 11.75,89.5 12.5,89.5 31.5,89.5 32.25,89.5 33,89.5 33.75,89.5 34.5,89.5 53.5,89.5 54.25,89.5 55,89.5 55.75,89.5 56.5,89.5 75.5,89.5 76.25,89.5 77,89.5 77.75,89.5 78.5,89.5 97.5,89.5 98.25,89.5 99,89.5 99.75,89.5 100.5,89.5 -9.75,89.75 26.25,90 27,90 27.75,90 28.5,90 29.25,90 47.5,90 48.25,90 49,90 49.75,90 50.5,90 69.5,90 70.25,90 71,90 71.75,90 72.5,90 91.5,90 92.25,90 93,90 93.75,90 94.5,90 113,90 113.75,90 114.5,90 115.25,90 116,90 75.5,91.25 79.25,91.25 98,91.5 101.75,91.5 4.25,91.75 9.25,91.75 13,91.75 31.75,91.75 35.5,91.75 53.75,91.75 57.5,91.75 75.5,93.75 79.25,93.75 98,94 101.75,94 9.25,94.25 13,94.25 31.75,94.25 35.5,94.25 53.75,94.25 57.5,94.25 -10.5,95.75 19.25,96.25 41.25,96.25 63.25,96.25 79.25,96.25 85.25,96.25 107.25,96.25 -6,96.5 98,96.5 101.75,96.5 -33.282,96.755 9.25,96.75 13,96.75 31.75,96.75 35.5,96.75 53.75,96.75 57.5,96.75 -13,97.25 0.5,98 -33.282,99.255 -6.5,99.5 -7.5,99.525 -7.5,100.75 -33.282,101.755 -7,103.25 -21.75,104 -1.988,104.216 -33.282,104.255 -19.75,105.25 -3.238,105.466 -17.032,105.505 -14.532,105.505 -1.988,106.716 -33.25,106.75 -5,107 -3.238,107.966 -0.738,107.966 6.762,107.966 9.262,107.966 -14.532,108.005 1.75,108 4.25,108 -10.25,108.25 -33.25,109.25 -2,109.25 0.5,109.25 3,109.25 5.5,109.25 8,109.25 -28.282,109.255 -4.75,109.75 -0.738,110.466 6.762,110.466 9.262,110.466 24.262,110.466 26.762,110.466 29.262,110.466 -13.282,110.505 1.75,110.5 4.25,110.5 19.25,110.5 21.75,110.5 31.75,110.5 34.25,110.5 36.75,110.5 39.25,110.5 41.75,110.5 44.25,110.5 46.75,110.5 49.25,110.5 51.75,110.5 61.75,110.5 64.25,110.5 66.75,110.5 69.25,110.5 71.75,110.5 74.25,110.5 76.75,110.5 79.25,110.5 81.75,110.5 84.25,110.5 87.5,110.5 99.75,110.5 87.5,111.5 99.75,111.5 -30.782,111.755 -28.282,111.755 -25.782,111.755 0.5,111.75 3,111.75 5.5,111.75 8,111.75 20.5,111.75 23,111.75 25.5,111.75 28,111.75 30.5,111.75 33,111.75 35.5,111.75 38,111.75 40.5,111.75 43,111.75 45.5,111.75 48,111.75 50.5,111.75 53,111.75 63,111.75 65.5,111.75 68,111.75 70.5,111.75 73,111.75 75.5,111.75 78,111.75 80.5,111.75 83,111.75 85.5,111.75 87.5,112.5 99.75,112.5 87.5,113.5 99.75,113.5 88.5,114.5 89.5,114.5 90.5,114.5 100.75,114.5 101.75,114.5 102.75,114.5 99.75,116.75 102.25,116.75 99.75,117.5 102.25,117.5 99.75,118.25 102.25,118.25 99.75,119 102.25,119 99.75,119.75 102.25,119.75 99.75,120.5 100.5,120.5 101.5,120.5 102.25,120.5 86.25,125.75 87.25,125.75 88.25,125.75 89.25,125.75 90.25,125.75 91.25,125.75 92.25,125.75 93.25,125.75 108.5,126 86.25,126.5 87.25,126.5 88.25,126.5 89.25,126.5 90.25,126.5 91.25,126.5 92.25,126.5 93.25,126.5 86.25,127.25 87.25,127.25 88.25,127.25 89.25,127.25 90.25,127.25 91.25,127.25 92.25,127.25 93.25,127.25 86.5,148 87.5,148 88.5,148 89.5,148 90.5,148 91.5,148 92.5,148 93.5,148 113,148 115.5,148 118,148 86.5,148.75 87.5,148.75 88.5,148.75 89.5,148.75 90.5,148.75 91.5,148.75 92.5,148.75 93.5,148.75 109.75,149.25 111.75,149.25 114.25,149.25 116.75,149.25 86.5,149.5 87.5,149.5 88.5,149.5 89.5,149.5 90.5,149.5 91.5,149.5 92.5,149.5 93.5,149.5 109.75,150.5 113,150.5 115.5,150.5 118,150.5 111.75,151.75 114.25,151.75 116.75,151.75 110.5,153 113,153 115.5,153 118,153 99.75,154 101,154 102.25,154 111.75,154.25 99.75,155 102.25,155 109.5,155.25 110.5,155.5 99.75,156 102.25,156 109.5,156 99.75,157 102.25,157 99.75,158 102.25,158 108,158 110.5,158 99.75,159 101,159 102.25,159 89.25,159.25 91.75,159.25 94.25,159.25 96.75,159.25 104.25,159.25 106.75,159.25 109.25,159.25 88,160.5 90.5,160.5 93,160.5 95.5,160.5 98,160.5 100.5,160.5 103,160.5 105.5,160.5 108,160.5 110.5,160.5
  other v2: 20.016,11.516 21.531,11.518 23.055,11.518 24.452,11.518 25.849,11.518 42.016,11.516 43.531,11.518 45.055,11.518 46.452,11.518 47.849,11.518 64.016,11.516 65.531,11.518 67.055,11.518 68.452,11.518 69.849,11.518 86.016,11.516 87.531,11.518 89.055,11.518 90.452,11.518 91.849,11.518 108.016,11.516 109.531,11.518 111.055,11.518 112.452,11.518 113.849,11.518 20.016,13.04 21.531,13.042 23.055,13.042 24.452,13.042 25.849,13.042 42.016,13.04 43.531,13.042 45.055,13.042 46.452,13.042 47.849,13.042 64.016,13.04 65.531,13.042 67.055,13.042 68.452,13.042 69.849,13.042 86.016,13.04 87.531,13.042 89.055,13.042 90.452,13.042 91.849,13.042 108.016,13.04 109.531,13.042 111.055,13.042 112.452,13.042 113.849,13.042 20.016,14.564 21.531,14.566 23.055,14.566 24.452,14.566 25.849,14.566 42.016,14.564 43.531,14.566 45.055,14.566 46.452,14.566 47.849,14.566 64.016,14.564 65.531,14.566 67.055,14.566 68.452,14.566 69.849,14.566 86.016,14.564 87.531,14.566 89.055,14.566 90.452,14.566 91.849,14.566 108.016,14.564 109.531,14.566 111.055,14.566 112.452,14.566 113.849,14.566 20.016,16.088 21.531,16.09 23.055,16.09 24.452,16.09 25.849,16.09 42.016,16.088 43.531,16.09 45.055,16.09 46.452,16.09 47.849,16.09 64.016,16.088 65.531,16.09 67.055,16.09 68.452,16.09 69.849,16.09 86.016,16.088 87.531,16.09 89.055,16.09 90.452,16.09 91.849,16.09 108.016,16.088 109.531,16.09 111.055,16.09 112.452,16.09 113.849,16.09 20.016,17.612 21.531,17.614 23.055,17.614 24.452,17.614 25.849,17.614 42.016,17.612 43.531,17.614 45.055,17.614 46.452,17.614 47.849,17.614 64.016,17.612 65.531,17.614 67.055,17.614 68.452,17.614 69.849,17.614 86.016,17.612 87.531,17.614 89.055,17.614 90.452,17.614 91.849,17.614 108.016,17.612 109.531,17.614 111.055,17.614 112.452,17.614 113.849,17.614 86.518,118.151 88.042,118.151 89.566,118.151 91.09,118.151 92.614,118.151 86.518,119.548 88.042,119.548 89.566,119.548 91.09,119.548 92.614,119.548 86.518,120.945 88.042,120.945 89.566,120.945 91.09,120.945 92.614,120.945 86.518,122.469 88.042,122.469 89.566,122.469 91.09,122.469 92.614,122.469 86.516,123.984 88.04,123.984 89.564,123.984 91.088,123.984 92.612,123.984 86.518,151.151 88.042,151.151 89.566,151.151 91.09,151.151 92.614,151.151 86.518,152.548 88.042,152.548 89.566,152.548 91.09,152.548 92.614,152.548 86.518,153.945 88.042,153.945 89.566,153.945 91.09,153.945 92.614,153.945 86.518,155.469 88.042,155.469 89.566,155.469 91.09,155.469 92.614,155.469 86.516,156.984 88.04,156.984 89.564,156.984 91.088,156.984 92.612,156.984
  other v3: -13.75,46.95 -13.75,48.05 -13,66.2 -13,67.3
HI_1: D5_B1.6 R6_B1.2 U1.97 | length 75.2
  Top Layer w0.3: U1.97@-9.935,24.511 -6.75,27.696 v1(-6.75,28.5) ; v1(12.25,77) 12.85,76.4 12.85,76.1 D5_B1.6@12.9,76.05 ; v1(14,79) 14,78.909 14.25,78.659 R6_B1.2@14.25,77.75
  Layer 2 w0.3: v1(-6.75,28.5) -6.75,29.25 2,38 2,75 7,80 13,80 v1(14,79) 12.314,77.314 12.314,77.064 v1(12.25,77)
HI_2: D5_B2.6 R6_B2.2 U1.100 | length 99.4
  Top Layer w0.3: U1.100@-10.996,25.572 -8.25,28.318 v1(-8.25,30) ; v1(34.25,77) 34.85,76.4 34.85,76.1 D5_B2.6@34.9,76.05 ; R6_B2.2@36.25,77.75 v1(36.25,78.75)
  Layer 2 w0.3: v1(-8.25,30) -8.25,31.25 0,39.5 0,75 7,82 33,82 v1(36.25,78.75) 34.564,77.064 34.314,77.064 v1(34.25,77)
HI_3: D5_B3.6 R6_B3.2 U1.102 | length 123.8
  Top Layer w0.3: U1.102@-11.703,26.279 -9.75,28.232 v1(-9.75,31.5) ; v1(56.25,77) 56.85,76.4 56.85,76.1 D5_B3.6@56.9,76.05 ; R6_B3.2@58.25,77.75 v1(58.25,78.75)
  Layer 2 w0.3: v1(-9.75,31.5) -9.75,33 -2.25,40.5 -2.25,74.75 7,84 53,84 v1(58.25,78.75) 56.564,77.064 56.314,77.064 v1(56.25,77)
HI_4: D5_B4.6 R6_B4.2 U1.104 | length 148.3
  Top Layer w0.3: U1.104@-12.41,26.986 -11.25,28.146 v1(-11.25,33) ; v1(78.25,77) 78.85,76.4 78.85,76.1 D5_B4.6@78.9,76.05 ; R6_B4.2@80.25,77.75 v1(80.25,78.75)
  Layer 2 w0.3: v1(-11.25,33) -11.25,35.5 -4.25,42.5 -4.25,74.75 7,86 73,86 v1(80.25,78.75) 78.564,77.064 78.314,77.064 v1(78.25,77)
HI_5: D5_B5.6 R6_B5.2 U1.92 | length 175.7
  Top Layer w0.3: U1.92@-8.167,22.743 -6.475,24.436 -6.314,24.436 v1(-6.25,24.5) ; v1(4,74.5) 4,85 v1(7,88) ; v1(100.25,77) 100.85,76.4 100.85,76.1 D5_B5.6@100.9,76.05 ; R6_B5.2@102.25,77.75 v1(102.25,78.75)
  Layer 2 w0.3: v1(-6.25,24.5) -5,25.75 -5,28.25 4,37.25 v1(4,74.5) ; v1(7,88) 93,88 v1(102.25,78.75) 100.564,77.064 100.314,77.064 v1(100.25,77)
HI_IN_B1: C27_B1.2 D5_B1.1 R6_B1.1 U7_B1.12 | length 7.9
  Top Layer w0.203: C27_B1.2@14.6,74.75 14.6,73.4 15.152,72.848 16.877,72.848 U7_B1.12@16.9,72.825
  Top Layer w0.3: D5_B1.1@12.9,77.95 12.918,77.932 12.918,77.482 14.15,76.25 14.35,76.25 14.6,76 C27_B1.2@14.6,74.75
HI_IN_B2: C27_B2.2 D5_B2.1 R6_B2.1 U7_B2.12 | length 7.9
  Top Layer w0.203: C27_B2.2@36.6,74.75 36.6,73.4 37.152,72.848 38.877,72.848 U7_B2.12@38.9,72.825
  Top Layer w0.3: D5_B2.1@34.9,77.95 34.918,77.932 34.918,77.482 36.15,76.25 36.35,76.25 36.6,76 C27_B2.2@36.6,74.75
HI_IN_B3: C27_B3.2 D5_B3.1 R6_B3.1 U7_B3.12 | length 7.9
  Top Layer w0.203: C27_B3.2@58.6,74.75 58.6,73.4 59.152,72.848 60.877,72.848 U7_B3.12@60.9,72.825
  Top Layer w0.3: D5_B3.1@56.9,77.95 56.918,77.932 56.918,77.482 58.15,76.25 58.35,76.25 58.6,76 C27_B3.2@58.6,74.75
HI_IN_B4: C27_B4.2 D5_B4.1 R6_B4.1 U7_B4.12 | length 7.9
  Top Layer w0.203: C27_B4.2@80.6,74.75 80.6,73.4 81.152,72.848 82.877,72.848 U7_B4.12@82.9,72.825
  Top Layer w0.3: D5_B4.1@78.9,77.95 78.918,77.932 78.918,77.482 80.15,76.25 80.35,76.25 80.6,76 C27_B4.2@80.6,74.75
HI_IN_B5: C27_B5.2 D5_B5.1 R6_B5.1 U7_B5.12 | length 7.9
  Top Layer w0.203: C27_B5.2@102.6,74.75 102.6,73.4 103.152,72.848 104.877,72.848 U7_B5.12@104.9,72.825
  Top Layer w0.3: D5_B5.1@100.9,77.95 100.918,77.932 100.918,77.482 102.15,76.25 102.35,76.25 102.6,76 C27_B5.2@102.6,74.75
I_IND_1: R10.1 R83_B1.2 U16_B1.2 | length 44.2
  Top Layer w0.3: R10.1@1.25,17 v1(1.25,18) ; U16_B1.2@26.217,33.426 29.074,33.426 29.75,32.75 29.75,29.6 28.5,28.35 R83_B1.2@28.5,28.25 28.5,28.15 27.945,27.594 27.754,27.594 27.25,27.091 v1(27.25,22.25)
  Bottom Layer w0.3: v1(1.25,18) 5.5,22.25 7,22.25 v1(27.25,22.25)
I_IND_2: R17.1 R83_B2.2 U16_B2.2 | length 65
  Top Layer w0.3: R17.1@2.5,17 v1(2.5,18) ; U16_B2.2@48.217,33.426 48.218,33.425 50.584,33.425 51.75,32.259 51.75,29.6 50.5,28.35 R83_B2.2@50.5,28.25 50.5,28.15 49.945,27.594 49.754,27.594 49.25,27.091 49.25,21.841 49,21.591 v1(49,21.5)
  Bottom Layer w0.3: v1(2.5,18) 6.05,21.55 48.95,21.55 v1(49,21.5)
I_IND_3: R18.1 R83_B3.2 U16_B3.2 | length 86.3
  Top Layer w0.3: R18.1@3.75,17 v1(3.75,18) ; U16_B3.2@70.217,33.426 U16_B3.2@70.216,33.425 72.825,33.425 73.75,32.5 73.75,29.6 72.5,28.35 R83_B3.2@72.5,28.25 72.5,28.15 71.944,27.594 71.754,27.594 71.25,27.091 71.25,21.091 71,20.841 v1(71,20.75)
  Bottom Layer w0.3: v1(3.75,18) 6.5,20.75 v1(71,20.75)
I_IND_4: R19.1 R83_B4.2 U16_B4.2 | length 107.6
  Top Layer w0.3: R19.1@5,17 v1(5,18) ; U16_B4.2@92.217,33.426 92.218,33.425 94.825,33.425 95.75,32.5 95.75,29.6 94.5,28.35 R83_B4.2@94.5,28.25 94.5,28.15 93.945,27.594 93.754,27.594 93.25,27.091 v1(93.25,20)
  Bottom Layer w0.3: v1(5,18) 7,20 v1(93.25,20)